# EAGLE board openSipPuff (rev C) (EAGLE 7.1.0)
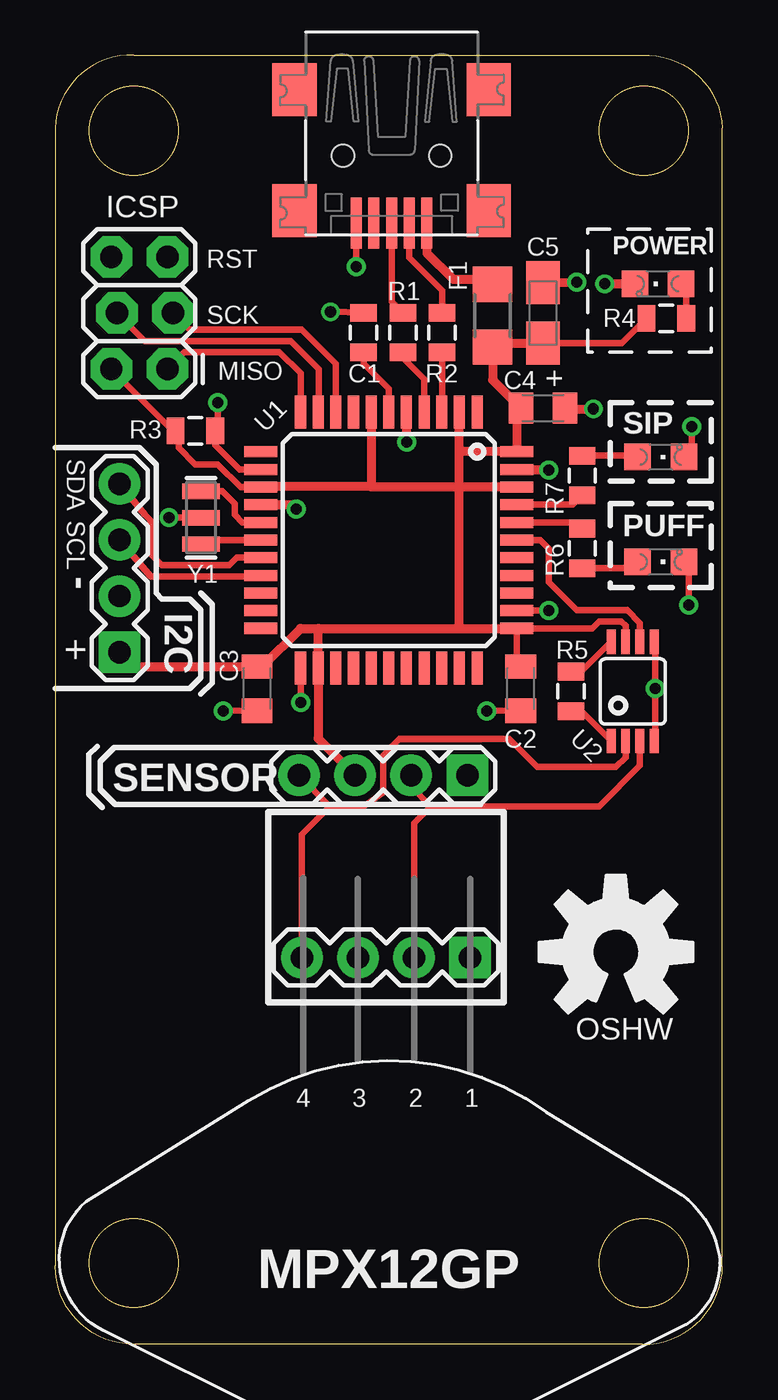
[diagram p0: board, top side]
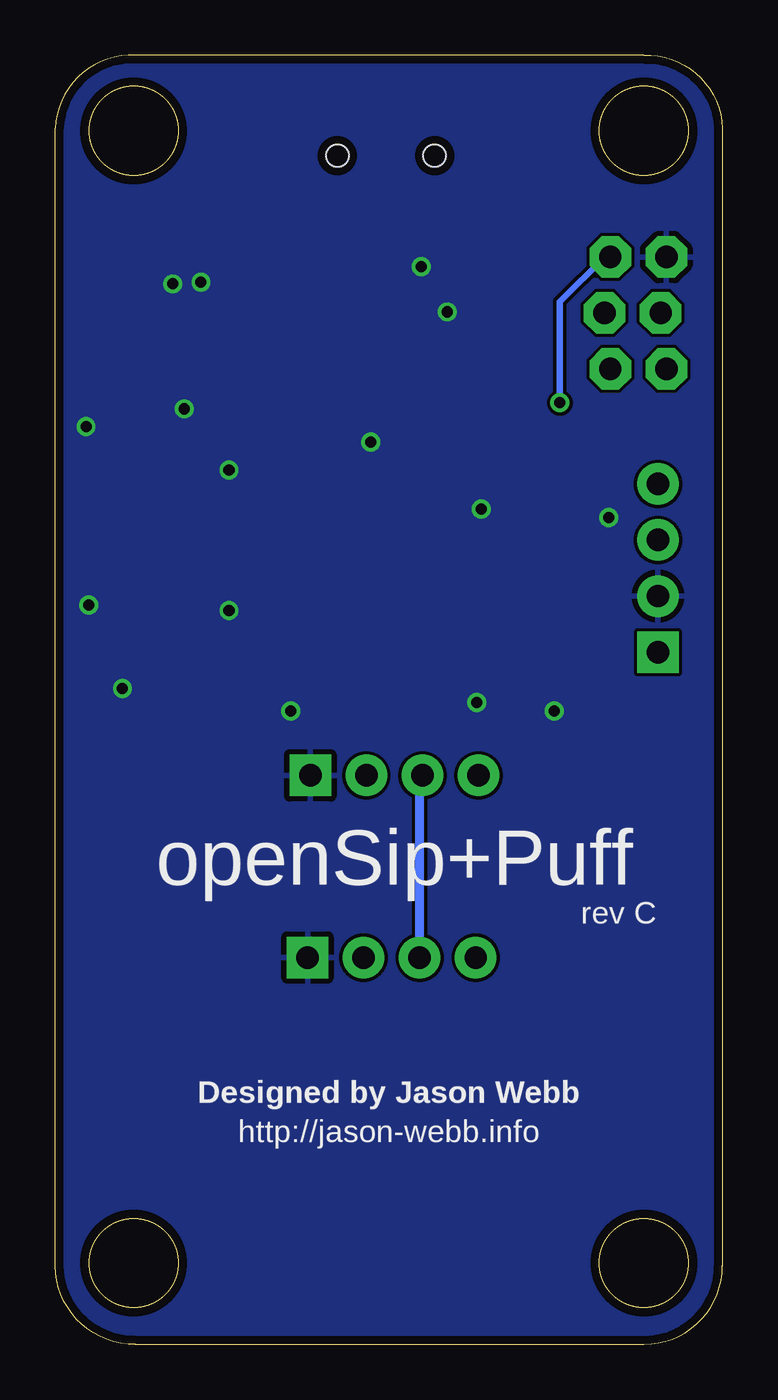
[diagram p1: board, bottom side, seen from below]

Size 30.23 x 58.42 mm. Coordinates in mm from the lower left corner, seen from the top.
Outline: 30.23,3.56 30.23,55.12 arc90 26.59,58.42 3.56,58.42 arc90 0,55.12 0,3.56 arc90 3.56,0 26.59,0 arc90 30.23,3.56
Outline: circle at 3.56,54.99 radius 2.02
Outline: circle at 26.67,54.99 radius 2.02
Copper layers (1*16): Top 0.0356mm / dielectric 1.5011mm / Bottom 0.0356mm
Design rules "LaenPCBOrder": minimum track width 6mil, minimum drill 13mil, track to track 6mil, track to pad 6mil, pad to pad 6mil, via to via 6mil, smd to smd 6mil, copper to edge 15mil, drill to drill 6mil, minimum pad ring 7mil, minimum via ring 7mil, stop-mask expansion 3mil, vias tented up to drill 0mil, thermal gap 10mil

## Footprints (pad centres in the part's own frame; a part is rotated, then mirrored left to right if it is on the bottom)
0805 = smd 0.8 x 1.2: 1 -0.9,0; 2 0.9,0
C0805K = smd 1.1 x 1.4: 1 -1,0; 2 1,0
A/3216-18R = smd 1.95 x 1.5: + 1.375,0; - -1.375,0
USB-MINIB = smd 0.5 x 2.308: D+ 0,4.064; D- -0.8,4.064; GND 1.6,4.064; ID 0.8,4.064; VBUS -1.6,4.064 | smd 2 x 2.4: GND1 -4.4,-2; GND2 -4.4,3.5; GND3 4.4,3.5; GND4 4.4,-2 | hole 1: -2.2,1; 2.2,1
R1206 = smd 1.6 x 1.803: 1 -1.422,0; 2 1.422,0
2X3_LOCK = drill 1.016 pad 1.88 octagon: 1 0,0; 2 0,2.54; 3 2.54,-0.254; 4 2.54,2.286; 5 5.08,0; 6 5.08,2.54
1X04 = drill 1.016 pad 1.88 square: 1 0,0 | drill 1.016 pad 1.88: 2 2.54,0; 3 5.08,0; 4 7.62,0
CHIPLED_0805 = smd 1.2 x 1.2: A 0,-1.05; C 0,1.05
SPARKFUN-DIGITALIC_TQFP44 = smd 1.5 x 0.5: 1 -5.8,4; 2 -5.8,3.2; 3 -5.8,2.4; 4 -5.8,1.6; 5 -5.8,0.8; 6 -5.8,0; 7 -5.8,-0.8; 8 -5.8,-1.6; 9 -5.8,-2.4; 10 -5.8,-3.2; 11 -5.8,-4; 23 5.8,-4; 24 5.8,-3.2; 25 5.8,-2.4; 26 5.8,-1.6; 27 5.8,-0.8; 28 5.8,0; 29 5.8,0.8; 30 5.8,1.6; 31 5.8,2.4; 32 5.8,3.2; 33 5.8,4 | smd 0.5 x 1.5: 12 -4,-5.8; 13 -3.2,-5.8; 14 -2.4,-5.8; 15 -1.6,-5.8; 16 -0.8,-5.8; 17 0,-5.8; 18 0.8,-5.8; 19 1.6,-5.8; 20 2.4,-5.8; 21 3.2,-5.8; 22 4,-5.8; 34 4,5.8; 35 3.2,5.8; 36 2.4,5.8; 37 1.6,5.8; 38 0.8,5.8; 39 0,5.8; 40 -0.8,5.8; 41 -1.6,5.8; 42 -2.4,5.8; 43 -3.2,5.8; 44 -4,5.8
MSOP-8 = smd 0.4 x 1.1: 1 -0.975,-2.25; 2 -0.325,-2.25; 3 0.325,-2.25; 4 0.975,-2.25; 5 0.975,2.25; 6 0.325,2.25; 7 -0.325,2.25; 8 -0.975,2.25
RESONATOR-SMD = smd 0.7 x 1.7: 1 -1.2,0; 2 0,0; 3 1.2,0

## Placement (x,y rotation side)
C1  1uF  [0805]  13.97,45.85 90 top
C2  0.1uF  [C0805K]  21.08,29.72 270 top
C3  0.1uF  [C0805K]  9.14,29.72 270 top
C4  0.1uF  [C0805K]  22.1,42.42 0 top
C5  10uF  [A/3216-18R]  22.1,46.74 270 top
CN2  [USB-MINIB]  15.24,54.86 180 top
F1  500mA  [R1206]  19.81,46.61 270 top
J1  AVR_SPI_PRG_62X3_LOCK  [2X3_LOCK]  5.08,44.2 90 top
J2  I2C  [1X04]  2.92,31.37 90 top
LED1  GREEN  [CHIPLED_0805]  27.3,48.06 90 top
LED2  RED  [CHIPLED_0805]  27.43,35.46 270 top
LED3  BLUE  [CHIPLED_0805]  27.43,40.21 270 top
LOGO1  OSHW-LOGOL  [OSHW-LOGO-L]  25.4,17.78 0 top
R1  22  [0805]  15.75,45.85 270 top
R2  22  [0805]  17.53,45.85 270 top
R3  10k  [0805]  6.35,41.4 180 top
R4  82  [0805]  27.69,46.48 180 top
R5  1.3k  [0805]  23.37,29.59 270 top
R6  82  [0805]  23.88,36.07 270 top
R7  82  [0805]  23.88,39.37 90 top
SENSOR  [1X04]  18.67,25.78 180 top
SENSOR1  [1X04]  18.8,17.53 180 top
U1  ATMEGA32U4TQFP  [SPARKFUN-DIGITALIC_TQFP44]  15.11,36.45 270 top
U2  AD8223  [MSOP-8]  26.16,29.59 0 top
U3  MPX12GP  [MPX12GP]  15.11,3.68 180 top
Y1  16MHz  [RESONATOR-SMD]  6.6,37.47 90 top

## Library data of the parts
C1 = SparkFun-Capacitors
C2-C5 CN2 F1 = adafruit
J1 J2 SENSOR SENSOR1 = SparkFun-Connectors
LED1-LED3 = led
LOGO1 = SparkFun-Aesthetics
R1-R7 = SparkFun-Resistors
U1 = SparkFun-DigitalIC
U2 U3 = sip-and-puff
Y1 = SparkFun-FreqCtrl; PROD_ID: XTAL-08900

## Nets
5V: C2.1 C3.1 C4.1 C5.+ F1.2 J1.2 J2.1 R3.2 R4.2 SENSOR1.3 SENSOR.3 U1.2 U1.7 U1.14 U1.24 U1.34 U1.42 U1.44 U2.7
D+: CN2.D+ R1.1
D-: CN2.D- R2.1
GND: C1.2 C2.2 C3.2 C4.2 C5.- CN2.GND J1.6 J2.2 LED1.C LED2.C LED3.C SENSOR1.1 SENSOR.1 U1.5 U1.15 U1.23 U1.35 U1.43 U2.4 U2.5 Y1.2
MISO: J1.1 U1.11
MOSI: J1.4 U1.10
N$1: R1.2 U1.4
N$2: R2.2 U1.3
N$3: C1.1 U1.6
N$4: CN2.VBUS F1.1
N$5: U1.17 Y1.1
N$6: U1.16 Y1.3
N$7: R5.2 U2.1
N$8: R6.1 U1.40
N$9: R7.1 U1.41
N$10: SENSOR1.2 SENSOR.2 U2.3
N$11: R5.1 U2.8
N$12: LED1.A R4.1
N$13: SENSOR1.4 SENSOR.4 U2.2
N$14: LED3.A R7.2
N$15: LED2.A R6.2
OUTPUT: U1.39 U2.6
RESET: J1.5 R3.1 U1.13
SCK: J1.3 U1.9
SCL: J2.4 U1.18
SDA: J2.3 U1.19

## Tracks (layer width: path | path; a pad name or v marks a point on that pad's centre or on a via)
5V
  Top 0.305: U1.14 8.39,38.85 7.37,39.88 6.35,39.88 5.59,40.64 5.59,41.01 R3.2 5.45,41.29 J1.2 | R4.2 25.66,45.36 C5.+ | C2.1 20.91,30.8 U1.34 24.32,32.45 24.64,32.77 25.65,32.77 25.84,32.58 U2.7
  Top 0.406: U1.2 18.29,42.25 18.29,40.39 | 18.29,40.39 18.29,38.86 | 18.29,38.86 18.29,32.45 | 18.29,32.45 U1.34 | 11.94,32.45 11.11,32.45 9.38,30.72 C3.1 3.32,30.72 J2.1 | 11.94,32.45 18.29,32.45 | U1.14 9.31,38.86 14.31,38.86 | 14.31,38.86 18.03,38.86 | 18.03,38.86 18.29,38.86 | U1.7 14.31,38.86 | U1.42 18.05,38.85 18.03,38.86 | 18.29,40.39 18.35,40.45 U1.44 20.91,42.23 C4.1 19.81,43.7 F1.2 19.99,45.36 C5.+ | 11.94,32.45 11.91,32.42 U1.24 11.91,27.46 SENSOR.3
  Bottom 0.406: SENSOR1.3 13.72,25.65 SENSOR.3
D+
  Top 0.305: CN2.D+ 15.24,47.26 R1.1
D-
  Top 0.305: CN2.D- 16.04,49.24 17.53,47.75 R2.1
GND  (via drill 0.5)
  Top 0.305: CN2.GND 13.64,49.1 v13.64,48.84 | C1.2 v12.47,46.79 | U1.35 v22.35,33.25 | v22.35,33.25 | C3.2 v7.62,28.7 | Y1.2 v5.16,37.47 | C2.2 v19.56,28.7 | U2.5 27.18,31.8 v27.18,29.72 27.18,27.38 U2.4 | LED3.C 28.83,40.81 v28.83,41.58 | LED2.C 28.7,35.24 v28.7,33.5 | U1.23 11.12,30.64 v11.12,29.08
  Top 0.406: C5.- v23.62,48.13 | U1.5 15.91,40.91 v15.93,40.89 | U1.15 10.97,38.05 v10.92,37.85 | U1.43 22.1,39.65 v22.35,39.62 | v24.89,48.06 LED1.C | C4.2 23.12,42.39 v24.38,42.39
  pour Bottom: -0.25,-0.25 30.48,-0.25 30.48,58.8 -0.25,58.8
MISO
  Top 0.305: J1.1 5.84,44.96 10.16,44.96 11.11,44.01 U1.11
MOSI
  Top 0.305: J1.4 4.06,45.47 10.67,45.47 11.94,44.2 11.94,42.27 U1.10
N$1
  Top 0.305: R1.2 15.75,44.7 16.71,43.74 U1.4
N$2
  Top 0.305: R2.2 17.53,42.26 U1.3
N$3
  Top 0.305: C1.1 13.97,44.45 15.11,43.31 U1.6
N$4
  Top 0.406: CN2.VBUS 16.84,49.45 18.03,48.26 19.58,48.26 F1.1
N$5
  Top 0.305: Y1.1 6.79,36.45 U1.17
N$6
  Top 0.305: Y1.3 7.56,38.66 8.13,38.1 8.13,37.59 8.47,37.25 U1.16
N$7
  Top 0.305: R5.2 23.84,28.69 U2.1
N$8
  Top 0.305: U1.40 23.59,37.25 R6.1
N$9
  Top 0.305: U1.41 23.45,38.05 R7.1
N$10
  Top 0.305: 17.02,24.38 24.64,24.38 26.49,26.23 U2.3 | SENSOR1.2 16.26,23.62 17.02,24.38 | SENSOR.2 16.13,25.27 17.02,24.38
N$11
  Top 0.305: R5.1 23.84,30.49 U2.8
N$12
  Top 0.305: LED1.A 28.59,47.83 R4.1
N$13
  Top 0.305: 12.45,24.38 13.97,24.38 14.86,25.02 14.86,26.7 15.6,27.43 20.57,27.43 21.84,26.16 25.4,26.16 25.84,26.6 U2.2 | SENSOR1.4 11.18,23.11 12.45,24.38 | SENSOR.4 12.45,24.38
N$14
  Top 0.305: 26.19,40.02 LED3.A 26.38,40.27 R7.2
N$15
  Top 0.305: R6.2 26.09,35.17 LED2.A
OUTPUT
  Top 0.305: U1.39 21.97,36.45 22.35,36.07 22.35,34.54 23.62,33.27 25.91,33.27 26.49,32.7 U2.6
RESET  (via drill 0.5)
  Top 0.305: U1.13 8.36,39.65 7.25,40.76 R3.1 7.37,41.26 v7.37,42.67
  Bottom 0.305: J1.5 5.33,49.28 7.37,47.24 v7.37,42.67
SCK
  Top 0.305: J1.3 6.1,45.97 11.18,45.97 12.71,44.44 U1.9
SCL
  Top 0.305: J2.4 4.06,37.59 4.32,37.34 4.32,35.81 4.83,35.31 7.87,35.31 8.22,35.65 U1.18
SDA
  Top 0.305: J2.3 4.32,34.8 9.26,34.8 U1.19

## Text on the board
tPlace: ICSP | RST | POWER | SCK | MISO | SIP | SDA | SCL | PUFF | - | + | I2C | OSHW
bPlace: openSip+Puff | rev C | Designed by Jason Webb | http://jason-webb.info